# Altium PCB H202.PcbDoc (part 1 of 4)
Units mm, origin at the board's own origin, x right, y up, seen from the top; angles counter-clockwise.
Board outline 35.5 x 51.5 mm, 2 copper layers (Top Layer, Bottom Layer); 187 components, 179 nets, 669 pads, 25 vias.
Unrouted connection lines stored in the file: 414.
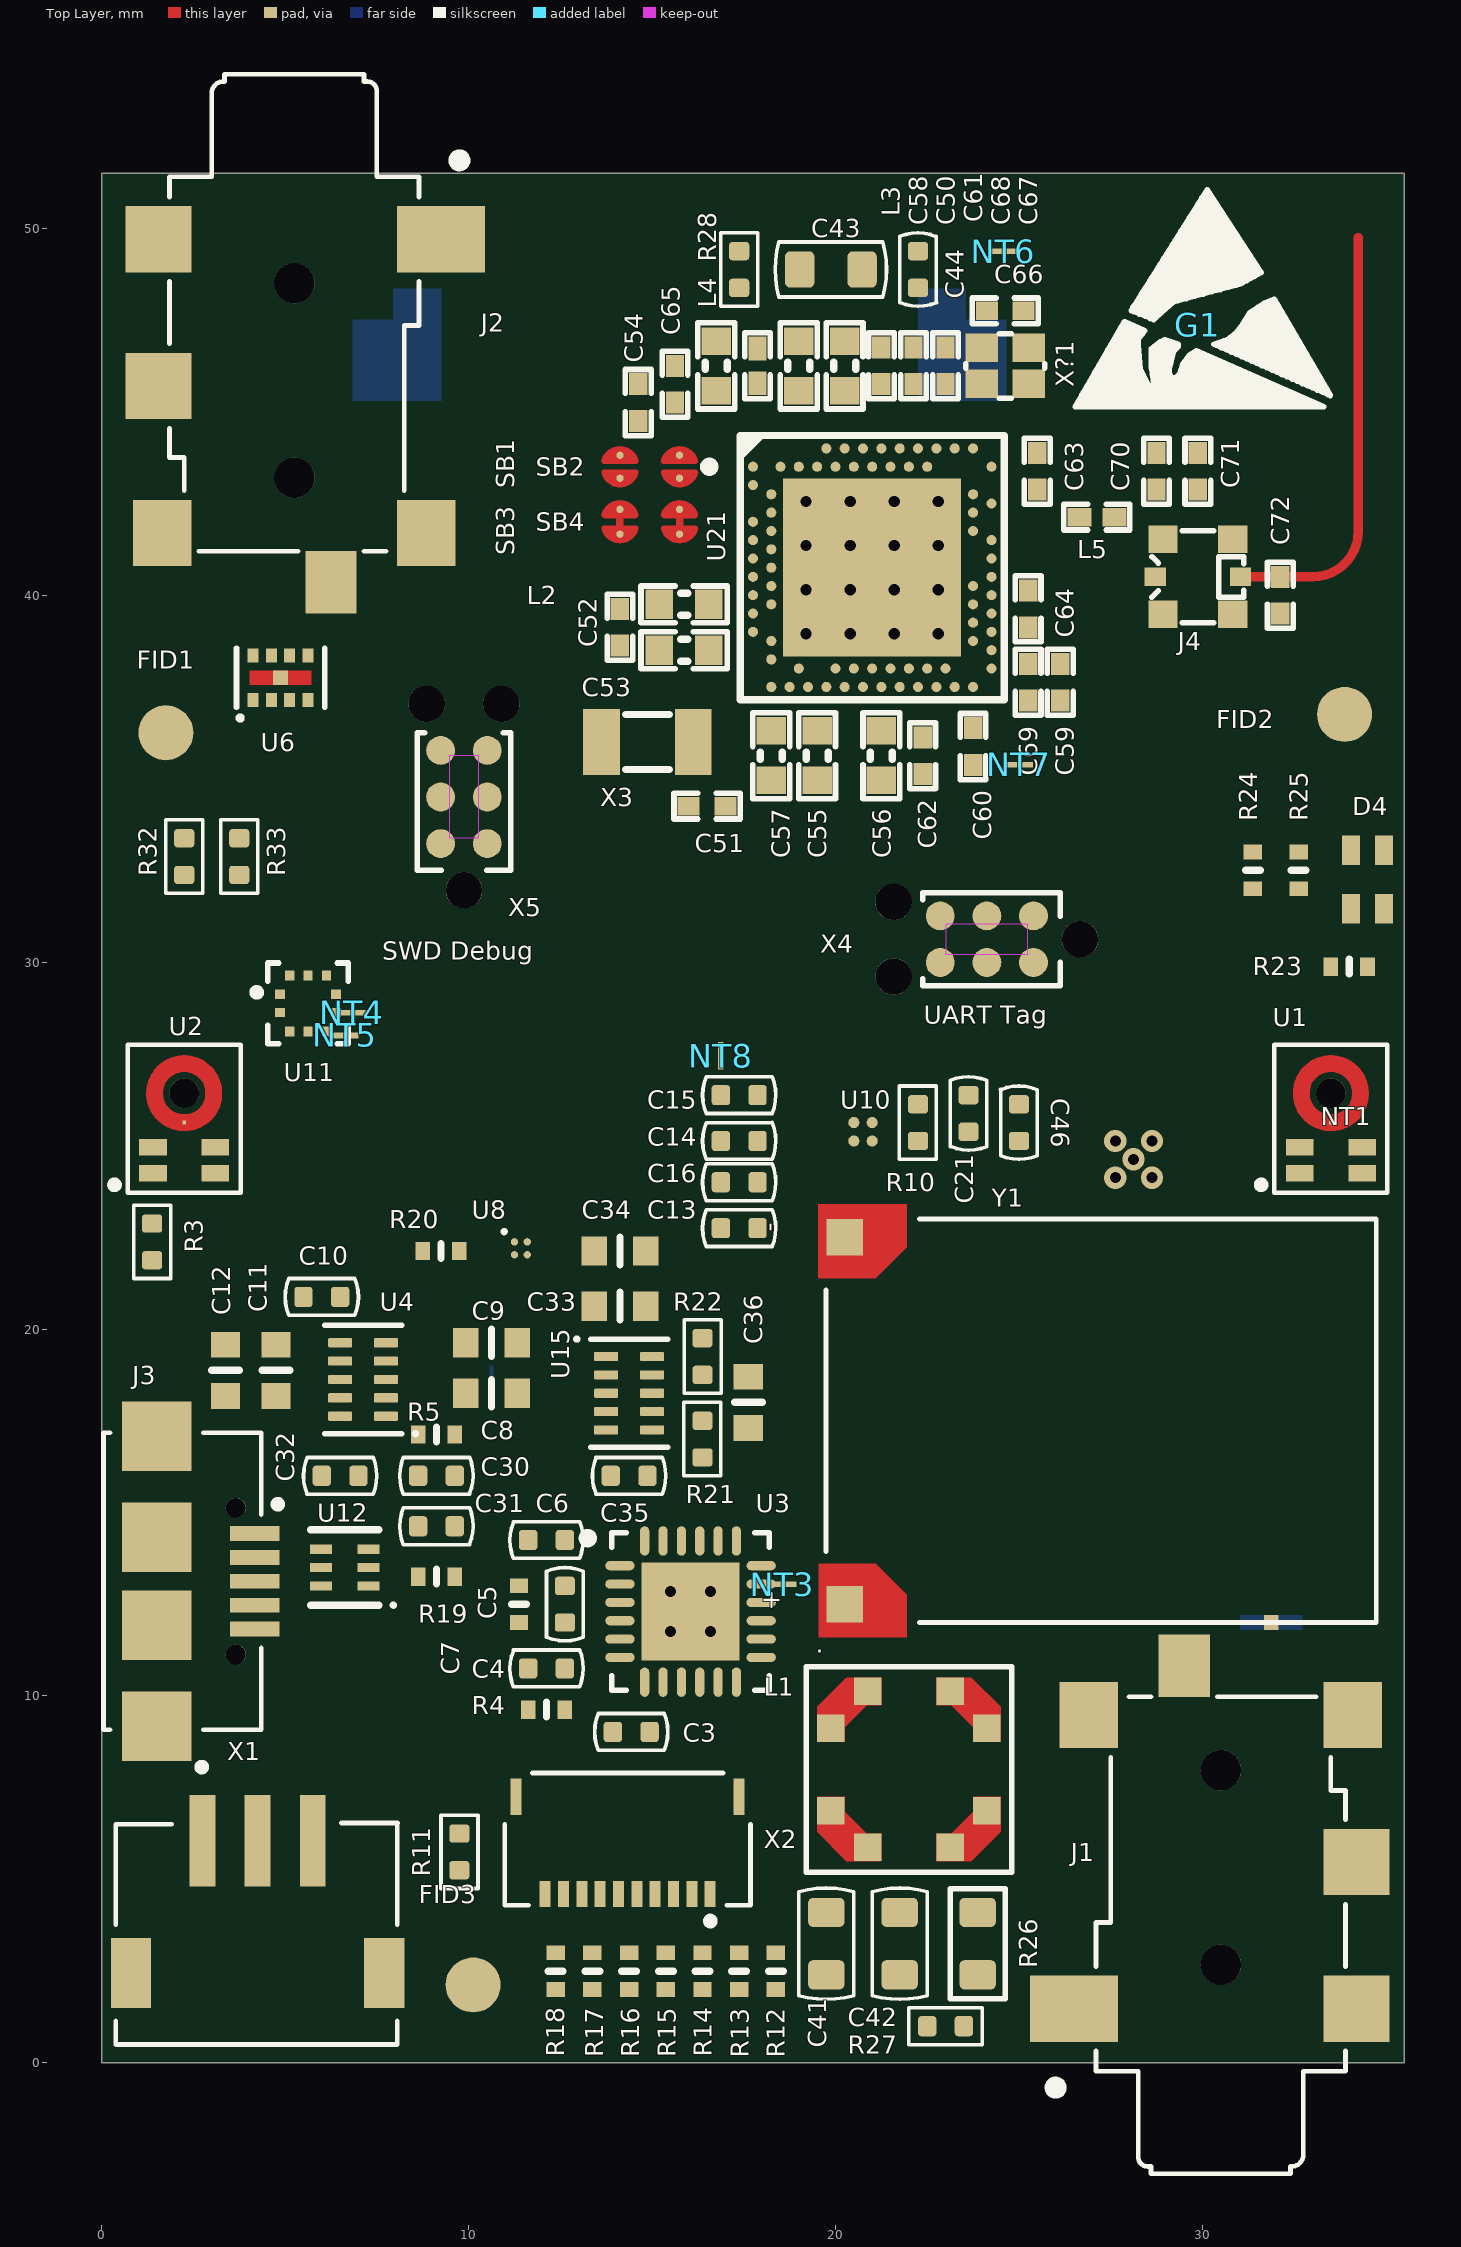
[diagram p0: Top Layer view]
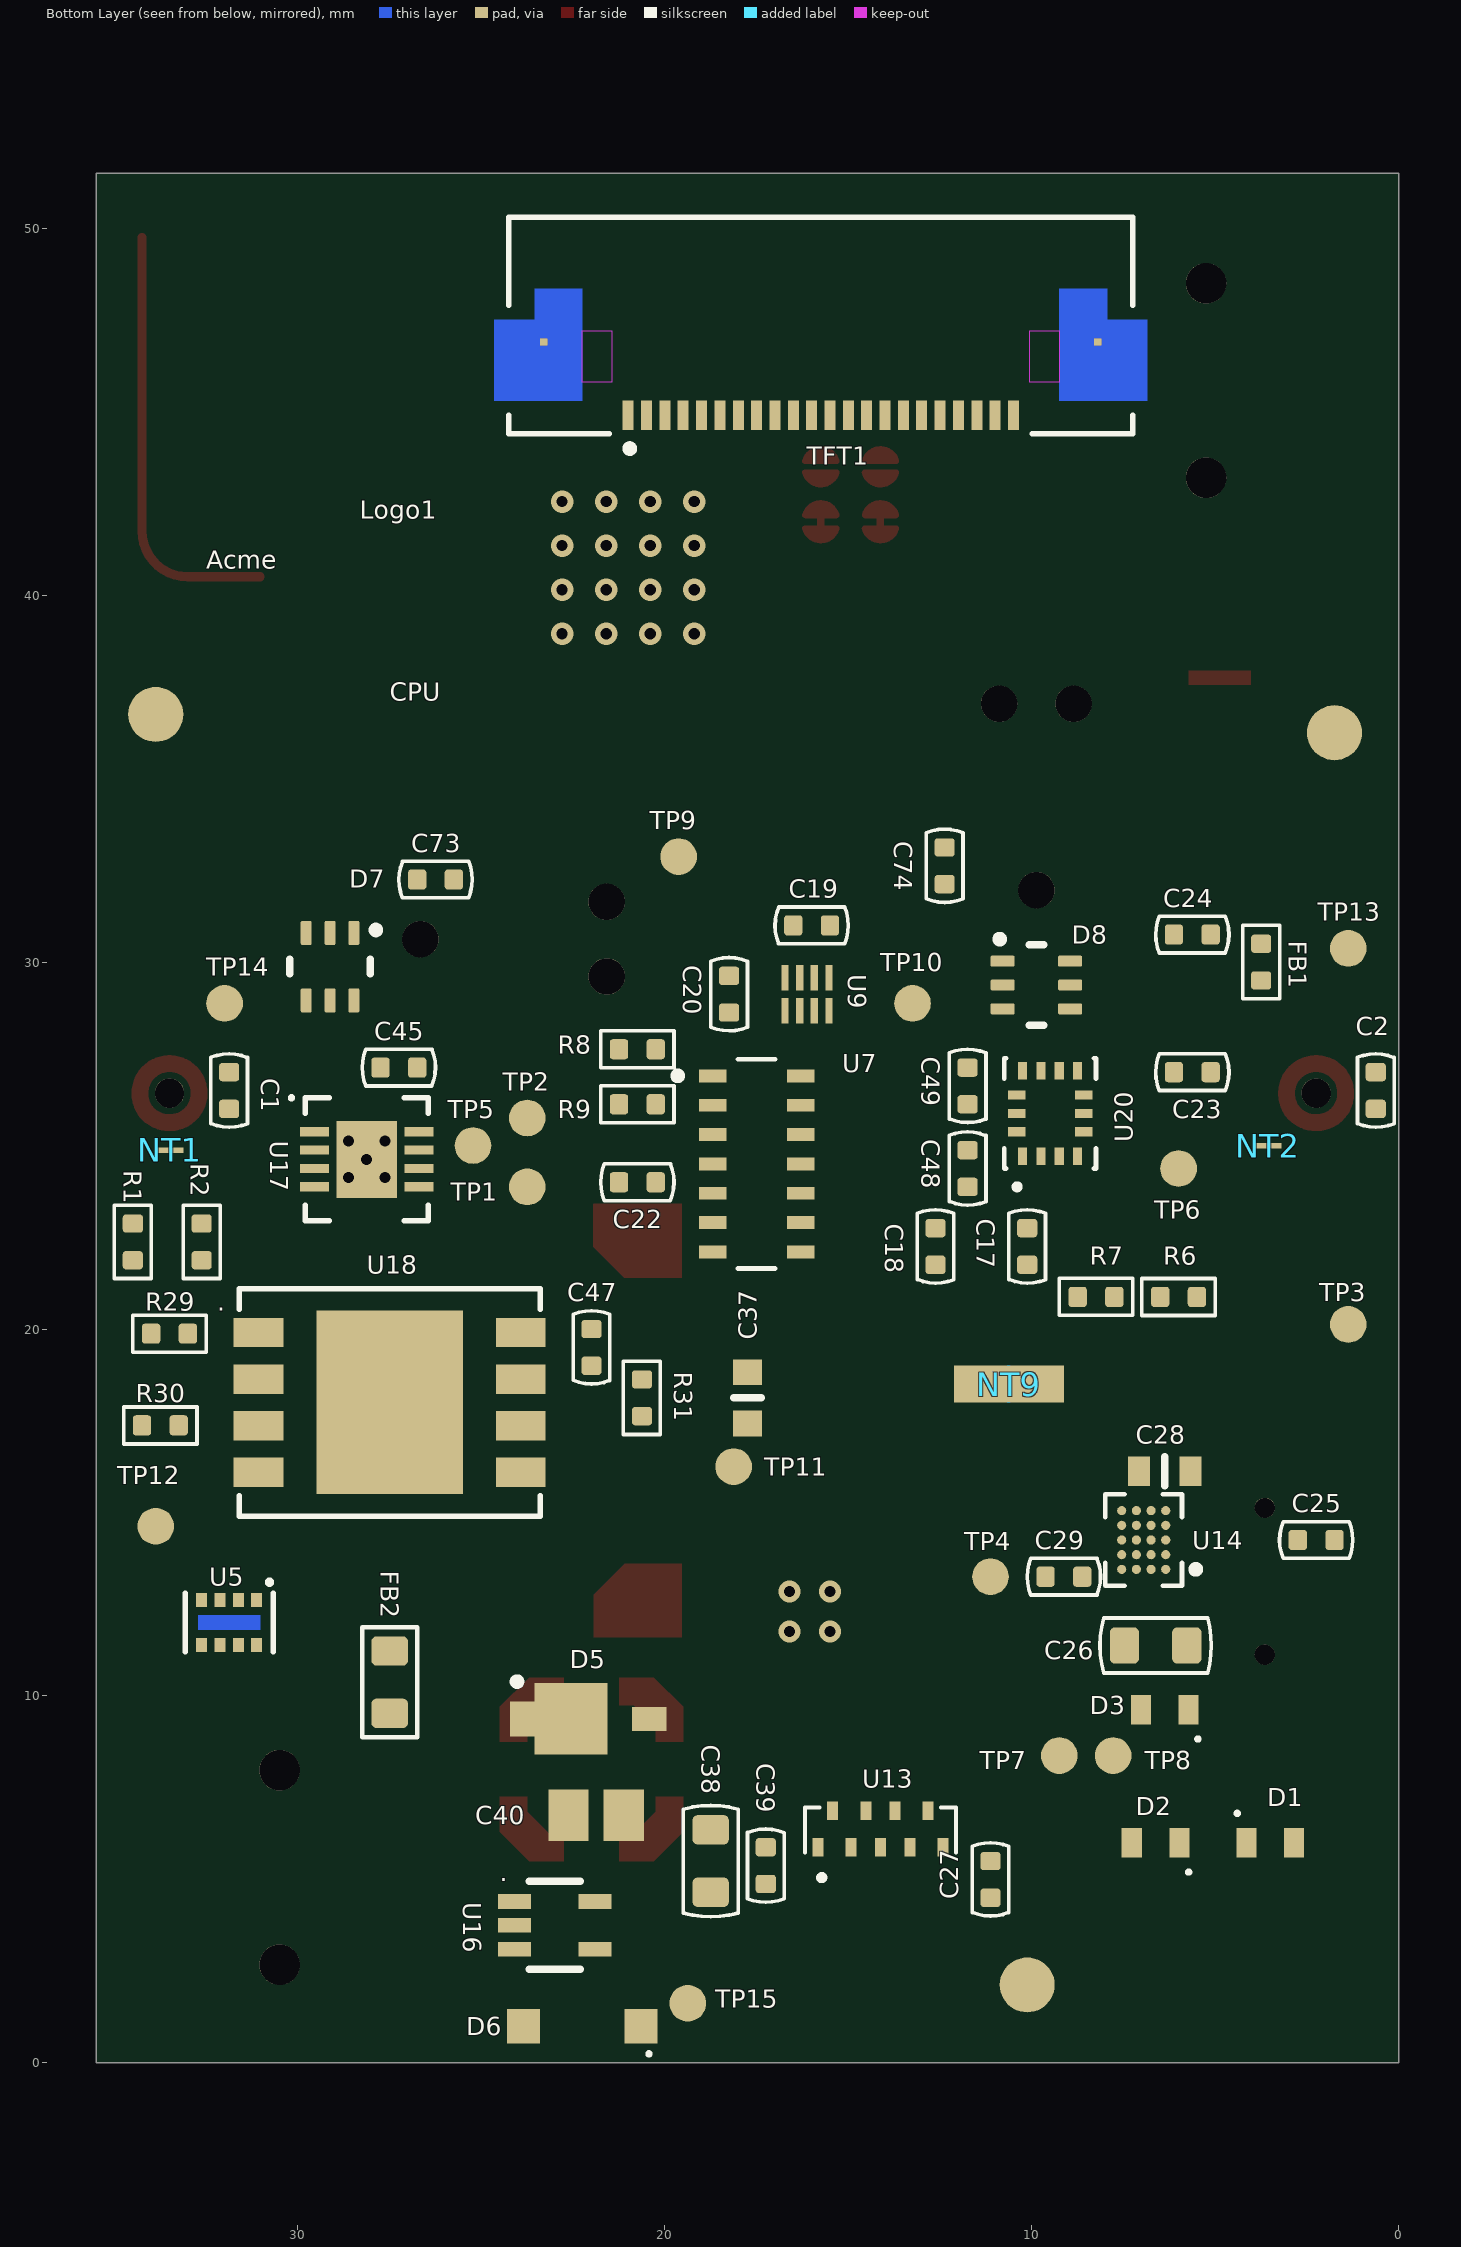
[diagram p1: Bottom Layer view, seen from below]

## Layer stack, top to bottom
Top Solder: solder mask 0.0102, Solder Resist, Dk 3.5
Top Layer: signal copper 0.0356
Dielectric 1: dielectric 0.32, FR-4, Dk 4.8
Bottom Layer: signal copper 0.0356
Bottom Solder: solder mask 0.0102, Solder Resist, Dk 3.5

## Board outline
0,0 35.5,0 35.5,51.5 0,51.5

## Design rules (kind name [scope] priority, off if disabled: settings)
Clearance [All] p1: gap=0.254 ignorepadtopadclearanceinfootprint=FALSE except(0: Arc-Hole Track-Hole SMDPad-Hole THPad-Hole Via-Hole Fill-Hole Poly-Hole Region-Hole Text-Hole)
DiffPairsRouting [All] p1: maxlimit=0.254 minlimit=0.254 mostfreqgap=0.254 toplayer_minwidth=0.381 toplayer_maxwidth=0.381 toplayer_prefwidth=0.381 bottomlayer_minwidth=0.381 bottomlayer_maxwidth=0.381 bottomlayer_prefwidth=0.381 maxuncoupledlength=12.7
PolygonConnect [All] p1: connectstyle=Relief reliefconductorwidth=0.254 reliefentries=4 polygonreliefangle="90 Angle" airgapwidth=0.254
RoutingVias [All] p1: holewidth=0.711 width=1.27 viastyle="Through Hole" minholewidth=0.711 minwidth=1.27 maxholewidth=0.711 maxwidth=1.27
SolderMaskExpansion [All] p1: expansion=0.102 istentingtop=FALSE
Width [All] p1: maxlimit=0.254 minlimit=0.254 preferedwidth=0.254
29 further rules are at their usual default settings.

## Classes and differential pairs
channel class TC2030-NL_TagConnect_6-pin: P01 P02 P012 P022
component class P02: C74 D8 X5
component class P01: C73 D7 X4
channel class TPSM82822_2A_Buck_Module: +3V3_PS1 +3V3_PS2
channel class IM69D130_MEMS_Microphone: MIC1 MIC2
net class USB: USB.D_N USB.D_P USB_CONN_N USB_CONN_P
net class QSPI: QSPI.CLK QSPI.IO0/DO QSPI.IO1/DI QSPI.IO2/WP QSPI.IO3/HD QSPI.NCS
component class VLT: C19 C20 U9
component class USB: C25 C26 D3 J3 U12
component class U_nrf52840_mcu: C50 C51 C52 C53 C54 C55 C56 C57 C58 C59 C60 C61 C62 C63 C64 C65 C66 C67 C68 C69 C70 C71 C72 J4 L2 L3 L4 L5 SB1 SB2 SB3 SB4 U21 X3 X?1
component class U_ESP32-WROOM32D_Module: R8 R9
component class U_BMI270-Accelerometer-Gyroscope: C48 C49 U20
component class TFT: C43 C44 R28 TFT1
component class TestPoint: TP1 TP2 TP3 TP4 TP5 TP6 TP7 TP8 TP9 TP10 TP11 TP12 TP13 TP14 TP15
component class PCB_FEATURE: Logo1
component class "Net Tie": NT1 NT2 NT3 NT4 NT5 NT6 NT7 NT8 NT9
component class MIC2: C2 R3 U2
component class MIC1: C1 R2 U1
component class LSW: C21 C22 R10 U10
component class LED_DRV: C45 C46 U17
component class K_PAD: C27 R11 R12 R13 R14 R15 R16 R17 R18 U13 X2
component class HRS1: C13 C14 C15 C16 U7
component class HRMI: NT8 R8 R9
component class HRME: R32 R33
component class FLASH: C47 R29 R30 R31 U18
component class FiducialMark: FID1 FID2 FID3
component class CODEC: C3 C4 C5 C6 C7 R4 U3
component class BMP388: C23 C24 FB1 U11
component class BL_PS: C38 C39 C40 C41 C42 D5 D6 FB2 L1 R26 R27 U16
component class BC: C28 C29 C30 C31 C32 R19 U14
component class +3V3_PS2: C33 C34 C35 C36 C37 R20 R21 R22 U15
component class +3V3_PS1: C8 C9 C10 C11 C12 R5 R6 R7 U4
component class +1V8_PS1: C17 C18 U8
differential pair USB_CONN: +USB_CONN_P -USB_CONN_N
differential pair USB.D: +USB.D_P -USB.D_N
differential pair D: +D_P -D_N

## Components (designator, comment, footprint, x,y, rotation, side; value= is the part's Value field where it differs from the comment)
C1 "CAP CER 0.1UF 50V X7R 0402" C0402 31.875,26.5 r270 bottom (schematic designator C2)
C2 "CAP CER 0.1UF 50V X7R 0402" C0402 0.625,26.5 r270 bottom
C3 "CAP CER 10nF 25V X7R 10% 0402" C0402 14.433,9.02 r0 top
C4 "CAP CER 10PF 50V C0G/NP0 0402" C0402 12.125,10.75 r0 top
C5 "C 100pF 50V C0G, NP0 0402" CAP_0402 11.375,12.5 r270 top
C6 "CAP CER 10nF 25V X7R 10% 0402" C0402 12.125,14.25 r0 top
C7 "CAP CER 0.1UF 50V X7R 0402" C0402 12.625,12.5 r270 top
C8 "CAP CER 10UF 16V X5R 0603" CAPC1608X08N_0603 10.625,18.25 r0 top (schematic designator C1)
C9 "CAP CER 10UF 16V X5R 0603" CAPC1608X08N_0603 10.625,19.625 r0 top (schematic designator C2)
C10 "CAP CER 100PF 50V C0G/NPO 0402" C0402 6,20.875 r180 top (schematic designator C3)
C11 "CAP CER 10UF 16V X5R 0603" CAPC1608X08N_0603 4.75,18.875 r270 top (schematic designator C4)
C12 "CAP CER 10UF 16V X5R 0603" CAPC1608X08N_0603 3.375,18.875 r270 top (schematic designator C5)
C13 "CAP CER 0.1UF 50V X7R 0402" C0402 17.375,22.75 r180 top (schematic designator C8)
C14 "CAP CER 4.7UF 6.3V X5R 0402" C0402 17.375,25.125 r0 top (schematic designator C9)
C15 "CAP CER 0.1UF 50V X7R 0402" C0402 17.375,26.375 r0 top (schematic designator C10)
C16 "CAP CER 10UF 6.3V X5R 0402" C0402 17.375,24 r180 top (schematic designator C11)
C17 "CAP CER 2.2UF 6.3V X5R 0402" C0402 10.124,22.25 r90 bottom (schematic designator C1)
C18 "CAP CER 2.2UF 6.3V X5R 0402" C0402 12.625,22.25 r90 bottom (schematic designator C2)
C19 "CGA2B3X7R1H104K050BB" C0402 16,31 r0 bottom (schematic designator C1)
C20 "CGA2B3X7R1H104K050BB" C0402 18.25,29.125 r270 bottom (schematic designator C2)
C21 "CAP CER 1UF 16V X5R 0402" C0402 23.625,25.875 r270 top (schematic designator C1)
C22 "CAP CER 0.1UF 50V X7R 0402" C0402 20.75,24 r0 bottom (schematic designator C2)
C23 "CAP CER 0.1UF 16V X7R 0402" C0402 5.625,27 r0 bottom (schematic designator C1)
C24 "CAP CER 0.1UF 16V X7R 0402" C0402 5.625,30.75 r0 bottom (schematic designator C2)
C25 "Value" C0402 2.25,14.25 r0 bottom (schematic designator C12)
C26 "Value" 0603C 6.625,11.375 r180 bottom (schematic designator C13)
C27 "CAP CER 0.1UF 50V X7R 0402" C0402 11.125,5 r270 bottom (schematic designator C14)
C28 "CAP CER 1UF 25V X5R 0603" CAP_0603 6.375,16.125 r180 bottom (schematic designator C15)
C29 "CAP CER 10UF 6.3V X5R 0402" C0402 9.125,13.25 r0 bottom (schematic designator C16)
C30 "CAP CER 4.7UF 6.3V X5R 0402" C0402 9.125,16 r0 top (schematic designator C17)
C31 "CAP CER 10UF 6.3V X5R 0402" C0402 9.125,14.625 r0 top (schematic designator C18)
C32 "CAP CER 2.2UF 6.3V X5R 0402" C0402 6.5,16 r180 top (schematic designator C19)
C33 "CAP CER 10UF 16V X5R 0603" CAPC1608X08N_0603 14.125,20.625 r0 top (schematic designator C1)
C34 "CAP CER 10UF 16V X5R 0603" CAPC1608X08N_0603 14.125,22.125 r0 top (schematic designator C2)
C35 "CAP CER 100PF 50V C0G/NPO 0402" C0402 14.375,16 r180 top (schematic designator C3)
C36 "CAP CER 10UF 16V X5R 0603" CAPC1608X08N_0603 17.625,18 r90 top (schematic designator C4)
C37 "CAP CER 10UF 16V X5R 0603" CAPC1608X08N_0603 17.75,18.125 r90 bottom (schematic designator C5)
C38 "CAP CER 10UF 16V X5R 0603" C0603 18.75,5.5 r270 bottom (schematic designator C1)
C39 "CAP CER 0.1UF 50V X7R 0402" C0402 17.25,5.375 r90 bottom (schematic designator C2)
C40 "CAP CER 10UF 16V X7R 0805" C0805 21.875,6.75 r180 bottom (schematic designator C3)
C41 "CAP CER 10UF 16V X5R 0603" C0603 19.75,3.25 r270 top (schematic designator C4)
C42 "CAP CER 10UF 16V X5R 0603" C0603 21.75,3.25 r90 top (schematic designator C5)
C43 "CAP CER 10UF 16V X5R 0603" C0603 19.875,48.875 r180 top (schematic designator C1)
C44 "CAP CER 0.1UF 16V X7R 0402" C0402 22.25,48.875 r270 top (schematic designator C2)
C45 "CAP CER 1UF 16V X5R 0402" C0402 27.25,27.125 r180 bottom (schematic designator C1)
C46 "CAP CER 0.1UF 50V X7R 0402" C0402 25,25.625 r90 top (schematic designator C2)
C47 "CAP CER 0.1UF 50V X7R 0402" C0402 22,19.5 r270 bottom (schematic designator C1)
C48 "CAP CER 0.1UF 16V X7R 0402" C0402 11.75,24.375 r90 bottom (schematic designator C1)
C49 "CAP CER 0.1UF 16V X7R 0402" C0402 11.75,26.625 r270 bottom (schematic designator C2)
C50 "4.7µF" CAPC1608X06L 20.25,46.25 r90 top (schematic designator C6)
C51 "12pF" CAPC1005X04L 16.5,34.25 r180 top (schematic designator C17)
C52 "12pF" CAPC1005X04L 14.125,39.125 r90 top (schematic designator C18)
C53 "4.7µF" CAPC1608X06L 15.875,38.5 r180 top (schematic designator C19)
C54 "100nF" CAPC1005X04L 14.625,45.25 r90 top (schematic designator C5)
C55 "4.7µF" CAPC1608X06L 19.5,35.625 r270 top (schematic designator C20)
C56 "1.0µF" CAPC1608X06L 21.25,35.625 r270 top (schematic designator C14)
C57 "4.7µF" CAPC1608X06L 18.25,35.625 r270 top (schematic designator C21)
C58 "1.0µF" CAPC1608X06L 19,46.25 r270 top (schematic designator C15)
C59 "47nF" CAPC1005X04L 26.125,37.625 r270 top (schematic designator C16)
C60 "100nF" CAPC1005X04L 23.75,35.875 r270 top (schematic designator C7)
C61 "N.C." CAPC1005X04L 21.25,46.25 r90 top (schematic designator C13)
C62 "100nF" CAPC1005X04L 22.375,35.625 r270 top (schematic designator C12)
C63 "0.8pF" CAPC1005X04L 25.5,43.375 r270 top (schematic designator C3)
C64 "820pF" CAPC1005X04L 25.25,39.625 r270 top (schematic designator C9)
C65 "100nF" CAPC1005X04L 15.625,45.75 r90 top (schematic designator C8)
C66 "12pF" CAPC1005X04L 24.625,47.75 r180 top (schematic designator C2)
C67 "12pF" CAPC1005X04L 23,46.25 r90 top (schematic designator C1)
C68 "100pF" CAPC1005X04L 22.125,46.25 r90 top (schematic designator C11)
C69 "N.C." CAPC1005X04L 25.25,37.625 r90 top (schematic designator C10)
C70 "0.5pF" CAPC1005X04L 28.75,43.375 r270 top (schematic designator C4)
C71 "N.C." CAPC1005X04L 29.875,43.375 r90 top (schematic designator C22)
C72 "1.2pF" CAPC1005X04L 32.125,40 r270 top (schematic designator C23)
C73 "CAP CER 0.1UF 50V X7R 0402" C0402 26.25,32.25 r180 bottom (schematic designator C1)
C74 "CAP CER 0.1UF 50V X7R 0402" C0402 12.375,32.625 r90 bottom (schematic designator C1)
D1 "ESDA7P120-1U1M" ST_QFN_1610 3.5,6 r180 bottom
D2 "ESDA7P120-1U1M" ST_QFN_1610 6.625,6 r0 bottom
D3 "ESDA7P120-1U1M" ST_QFN_1610 6.375,9.625 r0 bottom
D4 "150066M153000" LED_0606_RGB_WURTH 34.5,32.25 r90 top
D5 "STPS120MF" SODFL375X95-2N 22.125,9.375 r180 bottom (schematic designator D1)
D6 "MMSZ5226B-7-F" SOD-123 22.25,1 r0 bottom (schematic designator D2)
D7 "SMF05CT1G" SOT363_SOP65P210X265-6N 29.125,29.875 r270 bottom (schematic designator D1)
D8 "SMF05CT1G" SOT363_SOP65P210X265-6N 9.875,29.375 r180 bottom (schematic designator D1)
FB1 "FERRITE BEAD 1 KOHM 0402 1LN" L0402 3.75,30 r90 bottom
FB2 "FERRITE BEAD 470 OHM 0603 1LN" L0603 27.5,10.375 r270 bottom (schematic designator FB1)
FID1 "N/A" Fiducial 1.75,36.25 r0 top
FID2 "N/A" Fiducial 33.875,36.75 r90 top
FID3 "N/A" Fiducial 10.125,2.125 r90 top
G1 "Logo_ESD" Logo_ESD 29.875,47.375 r0 top
J1 "SJ2-25515B-SMT-TR" CUI_SJ2-25515B-SMT-TR 30.5,4.875 r90 top
J2 "SJ2-25515B-SMT-TR" CUI_SJ2-25515B-SMT-TR 5.25,46.3 r270 top
J3 "UJ2-MIBH-G-SMT-TR" CUI_UJ2-MIBH-G-SMT-TR 1.5,13.125 r270 top
J4 "MM8130-2600" COAXIAL-SWF 29.875,40.5 r90 top (schematic designator J1)
L1 "FIXED IND COUIPLED 6.8UH 1.2A 160 mOHM SMD" IND_LPD5030 22,8 r0 top
L2 "10µH" INDC1608X06L 15.875,39.75 r180 top (schematic designator L4)
L3 "15nH" INDC1005X04L 17.875,46.25 r90 top
L4 "10µH" INDC1608X06L 16.75,46.25 r270 top (schematic designator L2)
L5 "4.7nH" INDC1005X04L 27.125,42.125 r0 top (schematic designator L1)
Logo1 "Logo ACME_CPU" LOGO_ACME_CPU 27.5,40.625 r180 bottom (schematic designator Logo)
NT1 "Net Tie" "Net Tie 6x30mil"#1 33.5,24.875 r0 top net-tie
NT2 "Net Tie" "Net Tie 6x30mil"#2 3.572,25 r180 bottom net-tie
NT3 "Net Tie" "Net Tie 6x30mil"#2 18.551,13.04 r180 top net-tie
NT4 "Net Tie" "Net Tie 6x30mil"#2 6.822,28.625 r180 top net-tie
NT5 "Net Tie" "Net Tie 6x30mil"#2 6.625,28 r0 top net-tie
NT6 "Net Tie" "Net Tie 6x30mil"#2 24.572,49.375 r180 top net-tie
NT7 "Net Tie" "Net Tie 6x30mil"#2 25,35.375 r180 top net-tie
NT8 "Net Tie" "Net Tie 6x30mil"#2 16.875,27.447 r270 top net-tie
NT9 "Net Tie" "Net Tie 1x3mm" 10.625,18.5 r180 bottom net-tie
R1 "RES SMD 100 OHM 1% 1/16W 0402" 0402R 34.5,22.375 r270 bottom
R2 "RES SMD 100 OHM 1% 1/16W 0402" 0402R 32.625,22.375 r90 bottom
R3 "RES SMD 100 OHM 1% 1/16W 0402" 0402R 1.375,22.375 r90 top (schematic designator R2)
R4 "RES SMD 63.4K OHM 1% 1/16W 0402" R_0402 12.125,9.625 r180 top (schematic designator R3)
R5 "RES SMD 910K OHM 1% 1/16W 0402" R_0402 9.125,17.125 r0 top (schematic designator R1)
R6 "RES SMD 390K OHM 1% 1/16W 0402" R0402 6,20.875 r180 bottom (schematic designator R2)
R7 "RES SMD 88.7K OHM 1% 1/16W 0402" 0402R 8.25,20.875 r0 bottom (schematic designator R3)
R8 "RES SMD 2.7K OHM 1% 1/16W 0402" R0402 20.75,27.625 r0 bottom (schematic designator R4)
R9 "RES SMD 2.7K OHM 1% 1/16W 0402" R0402 20.75,26.125 r0 bottom (schematic designator R5)
R10 "RES SMD 10K OHM 1% 1/16W 0402" R0402 22.25,25.625 r270 top (schematic designator R1)
R11 "RES SMD 10K OHM 1% 1/16W 0402" 0402R 9.75,5.75 r90 top (schematic designator R8)
R12 "RES SMD 18.2K OHM 1% 1/16W 0402" R_0402 18.375,2.5 r90 top (schematic designator R9)
R13 "RES SMD 11K OHM 1% 1/16W 0402" R_0402 17.375,2.5 r90 top (schematic designator R10)
R14 "RES SMD 7.5K OHM 1% 1/10W 0603" R_0402 16.375,2.5 r90 top (schematic designator R11)
R15 "RES SMD 5.36K OHM 1% 1/16W 0402" R_0402 15.375,2.5 r90 top (schematic designator R12)
R16 "RC0402FR-072K7L" R_0402 14.375,2.5 r90 top (schematic designator R13)
R17 "RES SMD 2.7K OHM 1% 1/16W 0402" R_0402 13.375,2.5 r90 top (schematic designator R14)
R18 "RES SMD 1K OHM 1% 1/16W 0402" R_0402 12.375,2.5 r90 top (schematic designator R15)
R19 "RES SMD 5.1K OHM 1% 1/16W 0402" R_0402 9.125,13.25 r180 top (schematic designator R16)
R20 "RES SMD 910K OHM 1% 1/16W 0402" R_0402 9.25,22.125 r180 top (schematic designator R1)
R21 "RES SMD 390K OHM 1% 1/16W 0402" R0402 16.375,17 r270 top (schematic designator R2)
R22 "RES SMD 88.7K OHM 1% 1/16W 0402" 0402R 16.375,19.25 r90 top (schematic designator R3)
R23 "RES SMD 402 OHM 1% 1/16W 0402" R_0402 34,29.875 r0 top value=22k (schematic designator R17)
R24 "RES SMD 402 OHM 1% 1/16W 0402" R_0402 31.375,32.5 r90 top value=22k (schematic designator R18)
R25 "RES SMD 402 OHM 1% 1/16W 0402" R_0402 32.625,32.5 r90 top value=22k (schematic designator R19)
R26 "RES SMD 2.26 OHM 1% 1/10W 0603" R0603 23.875,3.25 r270 top (schematic designator R1)
R27 "RES SMD 63.4K OHM 1% 1/16W 0402" R0402 23,1 r0 top (schematic designator R2)
R28 "RES SMD 1K OHM 1% 1/16W 0402" R0402 17.375,48.875 r90 top (schematic designator R1)
R29 "RES SMD 10K OHM 1% 1/16W 0402" R0402 33.5,19.875 r180 bottom (schematic designator R1)
R30 "RES SMD 10K OHM 1% 1/16W 0402" R0402 33.75,17.375 r180 bottom (schematic designator R2)
R31 "RES SMD 10K OHM 1% 1/16W 0402" R0402 20.625,18.125 r270 bottom (schematic designator R3)
R32 "DNP*" 0402R 2.25,32.875 r90 top (schematic designator R6)
R33 "DNP*" 0402R 3.75,32.875 r90 top (schematic designator R7)
SB1 "Solderbridge" Solderbridge 15.75,43.5 r90 top (schematic designator SB4)
SB2 "Solderbridge" Solderbridge 14.125,43.5 r90 top (schematic designator SB3)
SB3 "Solderbridge" Solderbridge_Shorted 15.75,42 r90 top net-tie (schematic designator SB2)
SB4 "Solderbridge" Solderbridge_Shorted 14.125,42 r90 top net-tie (schematic designator SB1)
TFT1 "LH200K-IF05" CONN_0524352271_j 15.75,48 r270 bottom
TP1 "Test Point Pad" Testpoint 23.75,23.875 r180 bottom
TP2 "Test Point Pad" Testpoint 23.75,25.75 r90 bottom
TP3 "Test Point Pad" Testpoint 1.375,20.125 r90 bottom
TP4 "Test Point Pad" Testpoint 11.125,13.25 r90 bottom
TP5 "Test Point Pad" Testpoint 25.229,25 r90 bottom
TP6 "Test Point Pad" Testpoint 6,24.375 r90 bottom
TP7 "Test Point Pad" Testpoint 9.25,8.375 r90 bottom
TP8 "Test Point Pad" Testpoint 7.784,8.375 r90 bottom
TP9 "Test Point Pad" Testpoint 19.625,32.875 r90 bottom
TP10 "Test Point Pad" Testpoint 13.25,28.875 r90 bottom
TP11 "Test Point Pad" Testpoint 18.125,16.25 r90 bottom
TP12 "Test Point Pad" Testpoint 33.875,14.625 r90 bottom
TP13 "Test Point Pad" Testpoint 1.375,30.375 r90 bottom
TP14 "Test Point Pad" Testpoint 32,28.875 r90 bottom
TP15 "Test Point Pad" Testpoint 19.375,1.625 r90 bottom
U1 "IM69D130V01XTSA1" MIC_IM69D130V01XTSA1 33.5,25.75 r180 top (schematic designator U2)
U2 "IM69D130V01XTSA1" MIC_IM69D130V01XTSA1 2.25,25.75 r180 top
U3 "CMX655DQ6" QFN50P400X400X100_HS-25N 16.05,12.3 r0 top
U4 "TPSM82822SILR" SIL0010D 7.125,18.625 r180 top (schematic designator U1)
U5 "TPD3F303DPVR" DPV8_1P7X0P4#1 31.875,12 r270 bottom (schematic designator U4)
U6 "TPD3F303DPVR" DPV8_1P7X0P4#2 4.875,37.75 r90 top (schematic designator U5)
U7 "MAX30102EFD+T" XDCR_MAX30101EFD+ 17.5,24.5 r180 bottom (schematic designator U6)
U8 "LDLN025J18R" Flip-Chip4 11.425,22.2 r0 top (schematic designator U1)
U9 "TXS0102DQMR" DQM8 16.125,29.125 r270 bottom (schematic designator U1)
U10 "TPS22930AYZVT" YZV4_TEX 20.75,25.375 r90 top (schematic designator U1)
U11 "BMP388" QFN_BMP388_BOS 5.625,28.875 r0 top (schematic designator U1)
U12 "ECMF02-2AMX6" QFN-6L 6.625,13.5 r180 top (schematic designator U7)
U13 "D3V3F8U9LP3810-7" U-DFN3810-9 14.125,6.375 r90 bottom (schematic designator U8)
U14 "BQ25157YFPR" YFP0020 6.95,14.25 r0 bottom (schematic designator U9)
U15 "TPSM82822SILR" SIL0010D 14.375,18.25 r0 top (schematic designator U1)
U16 "TPS61169DCKR" DCK0005A_L 23,3.75 r180 bottom (schematic designator U1)
U17 "PCA9632TK,118" SOT908-1 28.125,24.625 r180 bottom (schematic designator U1)
U18 "MT29F1G01ABAFDWB-IT:F TR" W-PDFN-8_8X6_P127 27.5,18 r180 bottom (schematic designator U1)
U20 "BMI270" XDCR_BMI270 9.5,25.875 r90 bottom (schematic designator U1)
U21 "nRF52840-QIAA" AQFN50P700X700X85_HS-74N 21,40.75 r0 top (schematic designator U1)
X1 "BATT" JST_S3B-ZR-SM4A-TF 4.25,4.25 r0 top
X2 "CONN 5034801000 FFC FPC 10POS 0.50MM R/A" MOLEX_5034801000 14.335,6.1 r180 top
X3 "32.768kHz" XTAL_3215 14.875,36 r180 top (schematic designator X2)
X4 "SWD" TC2030-IDC-NL 24.125,30.625 r180 top (schematic designator X1)
X5 "DEBUG" TC2030-IDC-NL 9.875,34.5 r90 top (schematic designator X1)
X?1 "32MHz" 4-SMD 24.625,46.25 r0 top (schematic designator X?)
Y1 "CMS-151135-078S" SPKR_CMS-151135-078S 27.24,17.5 r270 top

## Footprints (in the part's own frame and the unit in brackets; to place one, negate y for a bottom-side part, rotate by r counter-clockwise, add the part's x,y. Pads: shape width x height; smd on the part's side, far side on the other; paste and mask are expansions set on the pad)
4-SMD [mm]
  rect 0.88x0.78 smd mask+0.075: 1(-0.64,-0.49) 2(0.64,-0.49) 3(0.64,0.49) 4(-0.64,0.49)
  silkscreen extent -1.08,-0.88 1.08,0.88, body extent -1.05,-0.85 1.05,0.85, height 0.56
0402R [mm]
  rrect35% 0.5x0.55 smd: 1(-0.5,0) 2(0.5,0)
  silkscreen extent -1,-0.51 1,0.5, body extent -0.53,-0.25 0.53,0.25, height 0.71
0603C [mm]
  rrect35% 0.8x0.991 smd: 1(-0.85,0) 2(0.85,0)
  silkscreen extent -1.52,-0.75 1.52,0.75, body extent -0.88,-0.48 0.87,0.47, height 0.87
AQFN50P700X700X85_HS-74N [mm]
  rect 4.85x4.85 smd mask+0.05: 74(0,0)
  round 0.275 smd paste+0.012 mask+0.05: A8(-1.25,3.25) A10(-0.75,3.25) A12(-0.25,3.25) A14(0.25,3.25) A16(0.75,3.25) A18(1.25,3.25) A20(1.75,3.25) A22(2.25,3.25) A23(2.75,3.25) AA24(3.25,-2.25) AB2(-2.75,-2.5) AC5(-2,-2.75) AC9(-1,-2.75) AC11(-0.5,-2.75) AC13(0,-2.75) AC15(0.5,-2.75) AC17(1,-2.75) AC19(1.5,-2.75) AC21(2,-2.75) AC24(3.25,-2.75) AD2(-2.75,-3.25) AD4(-2.25,-3.25) AD6(-1.75,-3.25) AD8(-1.25,-3.25) AD10(-0.75,-3.25) AD12(-0.25,-3.25) AD14(0.25,-3.25) AD16(0.75,-3.25) AD18(1.25,-3.25) AD20(1.75,-3.25) AD22(2.25,-3.25) AD23(2.75,-3.25) B1(-3.25,2.75) B3(-2.5,2.75) B5(-2,2.75) B7(-1.5,2.75) B9(-1,2.75) B11(-0.5,2.75) B13(0,2.75) B15(0.5,2.75) B17(1,2.75) B19(1.5,2.75) B24(3.25,2.75) C1(-3.25,2.25) D2(-2.75,2) D23(2.75,2) E24(3.25,1.75) F2(-2.75,1.5) F23(2.75,1.5) G1(-3.25,1.25) H2(-2.75,1) H23(2.75,1) J1(-3.25,0.75) J24(3.25,0.75) K2(-2.75,0.5) L1(-3.25,0.25) L24(3.25,0.25) M2(-2.75,0) N1(-3.25,-0.25) N24(3.25,-0.25) P2(-2.75,-0.5) P23(2.75,-0.5) R1(-3.25,-0.75) R24(3.25,-0.75) T2(-2.75,-1) T23(2.75,-1) U1(-3.25,-1.25) U24(3.25,-1.25) V23(2.75,-1.5) W1(-3.25,-1.75) W24(3.25,-1.75) Y2(-2.75,-2) Y23(2.75,-2)
  silkscreen extent -4.56,-3.6 3.6,3.6, body extent -3.55,-3.55 3.55,3.55, height 0.85
C0402 [mm]
  rrect35% 0.5x0.55 smd: 1(-0.5,0) 2(0.5,0)
  silkscreen extent -1,-0.5 1,0.5, body extent -0.53,-0.28 0.52,0.27, height 0.55
C0603 [mm]
  rrect35% 0.8x0.991 smd: 1(-0.85,0) 2(0.85,0)
  silkscreen extent -1.52,-0.75 1.52,0.75, body extent -0.88,-0.48 0.87,0.47, height 0.87
C0805 [mm] "Chip Capacitor, Body 2.0x1.3mm, IPC High Density"
  rect 1.1x1.4 smd: 1(-0.75,0) 2(0.75,0)
  body extent -1.1,-0.72 1.1,0.72, height 1.4
CAP_0402 [mm]
  rect 0.4x0.5 smd: 1(-0.5,0) 2(0.5,0)
  silkscreen extent 0,-0.2 0,0.2, body extent -0.5,-0.25 0.5,0.25, height 0.5
CAP_0603 [mm]
  rect 0.6x0.8 smd: 1(-0.7,0) 2(0.7,0)
  silkscreen extent 0,-0.4 0,0.4, body extent -0.75,-0.41 0.75,0.41, height 0.82
CAPC1005X04L [mm]
  rect 0.6x0.5 smd: 1(-0.5,0) 2(0.5,0)
  silkscreen extent -0.9,-0.35 0.9,0.35, body extent -0.51,-0.25 0.51,0.25, height 0.5
CAPC1608X06L [mm]
  rect 0.75x0.8 smd: 1(-0.675,0) 2(0.675,0)
  silkscreen extent -1.17,-0.5 1.17,0.5, body extent -0.8,-0.43 0.8,0.43, height 0.8
CAPC1608X08N_0603 [mm]
  rect 0.7x0.8 smd: 1(-0.7,0) 2(0.7,0)
  silkscreen extent 0,-0.38 0,0.38, body extent -0.87,-0.47 0.88,0.48, height 0.9
COAXIAL-SWF [mm]
  rect 0.5x0.58 smd: 1(0,1.16) 3(0,-1.16)
  rect 0.75x0.8 smd: 2(-1.025,-0.95) 2(-1.025,0.95) 2(1.025,-0.95) 2(1.025,0.95)
  Top Layer pour cut-out: 0.65,-0.55 -0.65,-0.55 -0.65,-1.35 0.65,-1.35
  Top Layer pour cut-out: -0.65,0.55 0.65,0.55 0.65,1.35 -0.65,1.35
  silkscreen extent -1.25,-1.25 1.25,1.25, body extent -1.26,-1.3 1.26,1.3, height 1.55
CONN_0524352271_j [mm]
  rect 0.8x0.3 smd mask+0.05: 1(3.1,-5.25) 2(3.1,-4.75) 3(3.1,-4.25) 4(3.1,-3.75) 5(3.1,-3.25) 6(3.1,-2.75) 7(3.1,-2.25) 8(3.1,-1.75) 9(3.1,-1.25) 10(3.1,-0.75) 11(3.1,-0.25) 12(3.1,0.25) 13(3.1,0.75) 14(3.1,1.25) 15(3.1,1.75) 16(3.1,2.25) 17(3.1,2.75) 18(3.1,3.25) 19(3.1,3.75) 20(3.1,4.25) 21(3.1,4.75) 22(3.1,5.25)
  rect 0.2x0.2 smd mask+0.05: 23(1.1,7.55) 24(1.1,-7.55)
  Top Layer region: 2.7,6.5 2.7,8.9 0.5,8.9 0.5,7.8 -0.35,7.8 -0.35,6.5
  Top Layer region: 2.7,-6.5 2.7,-8.9 0.5,-8.9 0.5,-7.8 -0.35,-7.8 -0.35,-6.5
  Top Layer pour cut-out: -0.55,6.3 -0.55,8 0.3,8 0.3,9.1 2.9,9.1 2.9,6.3 2.2,6.3 2.2,5.7 0.8,5.7 0.8,6.3
  Top Layer pour cut-out: -0.55,-6.3 -0.55,-8 0.3,-8 0.3,-9.1 2.9,-9.1 2.9,-6.3 2.2,-6.3 2.2,-5.7 0.8,-5.7 0.8,-6.3
  Top Layer keep-out region: 0.8,6.5 2.2,6.5 2.2,5.7 0.8,5.7
  Top Layer keep-out region: 0.8,-5.7 2.2,-5.7 2.2,-6.5 0.8,-6.5
  silkscreen extent -2.3,-8.5 4.1,8.5, body extent -2,-8.8 3.2,8.8, height 2.1
CUI_SJ2-25515B-SMT-TR [mm]
  rect 1.8x2.4 smd: 1(-3.4,4)
  rect 1.8x1.6 smd: 2(4.6,3.6) 3(4.6,-3.6)
  rect 1.8x1.8 smd: 4(0.6,-3.7) 5(-3.4,-3.7)
  rect 1.7x1.4 smd: 10(5.95,1)
  round 1.1 hole 1.1 unplated: ""(-2.2,0) ""(3.1,0)
  silkscreen extent -7.9,-3.4 5.1,4.65, body extent -7.99,-4.1 6.21,4.7, height 3.99
CUI_UJ2-MIBH-G-SMT-TR [mm]
  rect 0.4x1.35 smd: 1(-1.3,2.675) 2(-0.65,2.675) 3(0,2.675) 4(0.65,2.675) 5(1.3,2.675)
  rect 1.9x1.9 smd: S1(-3.95,0) S2(-1.2,0) S3(1.2,0) S4(3.95,0)
  round 0.55 hole 0.55 unplated: ""(-2,2.15) ""(2,2.15)
  silkscreen extent -4.05,-1.45 4.05,3.4, body extent -4.05,-2.76 4.05,2.88, height 2.75
DCK0005A_L [mm]
  rect 0.9x0.4 smd paste-0.025 mask+0.05: 1(-1.1,0.65) 2(-1.1,0) 3(-1.1,-0.65) 4(1.1,-0.65) 5(1.1,0.65)
  silkscreen extent -0.7,-1.2 0.7,1.2, body extent -1.05,-1 1.05,1, height 1
DPV8_1P7X0P4#1 [mm]
  rect 0.38x0.3 smd paste+0 mask+0.05: 1(-0.61,0.75) 2(-0.61,0.25) 3(-0.61,-0.25) 4(-0.61,-0.75) 5(0.61,-0.75) 6(0.61,-0.25) 7(0.61,0.25) 8(0.61,0.75)
  rect 0.4x0.4 smd far side paste-0.837 mask+0.05: 9(0,0)
  Top Layer region: -0.2,0.85 0.2,0.85 0.2,-0.85 -0.2,-0.85
  silkscreen extent -1.15,-1.2 0.8,1.2, body extent -0.8,-1.05 0.8,1.05, height 0.65
DPV8_1P7X0P4#2 [mm]
  rect 0.38x0.3 smd paste+0 mask+0.05: 1(-0.61,0.75) 2(-0.61,0.25) 3(-0.61,-0.25) 4(-0.61,-0.75) 5(0.61,-0.75) 6(0.61,-0.25) 7(0.61,0.25) 8(0.61,0.75)
  rect 0.4x0.4 smd paste-0.837 mask+0.05: 9(0,0)
  Top Layer region: -0.2,-0.85 0.2,-0.85 0.2,0.85 -0.2,0.85
  silkscreen extent -1.15,-1.2 0.8,1.2, body extent -0.8,-1.05 0.8,1.05, height 0.65
DQM8 [mm]
  rect 0.7x0.2 smd mask+0.05: 1(-0.45,0.6) 2(-0.45,0.2) 3(-0.45,-0.2) 4(-0.45,-0.6) 5(0.45,-0.6) 6(0.45,-0.2) 7(0.45,0.2) 8(0.45,0.6)
  body extent -0.6,-0.9 0.6,0.9, height 0.5
Fiducial [mm]
  round 1.5 smd paste+0 mask+0.75: ""(0,0)
  round 1.5 smd far side paste+0 mask+0.75: ""(0,0)
  Top Layer pour cut-out: 0,1.6 0.158,1.6 0.467,1.538 0.758,1.418 1.02,1.243 1.243,1.02 1.418,0.758 1.538,0.467 1.6,0.158 1.6,0 1.6,0 1.6,-0.158 1.538,-0.467 1.418,-0.758 1.243,-1.02 1.02,-1.243 0.758,-1.418 0.467,-1.539 0.158,-1.6 0,-1.6 -0.158,-1.6 -0.467,-1.538 -0.758,-1.418 -1.02,-1.243 -1.243,-1.02 -1.418,-0.758 -1.538,-0.467 -1.6,-0.158 -1.6,0 -1.6,0.158 -1.538,0.467 -1.418,0.758 -1.243,1.02 -1.02,1.243 -0.758,1.418 -0.467,1.538 -0.158,1.6 0,1.6
  Bottom Layer pour cut-out: 0,1.6 0.158,1.6 0.467,1.538 0.758,1.418 1.02,1.243 1.243,1.02 1.418,0.758 1.538,0.467 1.6,0.158 1.6,0 1.6,-0.158 1.538,-0.467 1.418,-0.758 1.243,-1.02 1.02,-1.243 0.758,-1.418 0.467,-1.539 0.158,-1.6 0,-1.6 -0.158,-1.6 -0.467,-1.538 -0.758,-1.418 -1.02,-1.243 -1.243,-1.02 -1.418,-0.758 -1.538,-0.467 -1.6,-0.158 -1.6,0 -1.6,0.158 -1.538,0.467 -1.418,0.758 -1.243,1.02 -1.02,1.243 -0.758,1.418 -0.467,1.538 -0.158,1.6 0,1.6
  body extent -1.49,-1.5 1.5,1.5
Flip-Chip4 [mm]
  round 0.2 smd mask+0: A1(-0.175,0.175) A2(0.175,0.175) B1(-0.175,-0.175) B2(0.175,-0.175)
  silkscreen extent -0.5,0.41 -0.41,0.5, body extent -0.32,-0.32 0.32,0.32, height 0.45
IND_LPD5030 [mm]
  rect 0.75x0.75 smd: 1(-2.125,1.125) 1(-1.125,2.125) 2(-2.125,-1.125) 2(-1.125,-2.125) 3(1.125,-2.125) 3(2.125,-1.125) 4(1.125,2.125) 4(2.125,1.125)
  Top Layer region: -1.75,0.75 -2.5,0.75 -2.5,1.7 -1.7,2.5 -0.75,2.5 -0.75,1.75 -1.151,1.75 -1.75,1.151
  Top Layer region: 0.75,1.75 0.75,2.5 1.7,2.5 2.5,1.7 2.5,0.75 1.75,0.75 1.75,1.151 1.151,1.75
  Top Layer region: 1.75,-0.75 2.5,-0.75 2.5,-1.7 1.7,-2.5 0.75,-2.5 0.75,-1.75 1.151,-1.75 1.75,-1.151
  Top Layer region: -0.75,-1.75 -0.75,-2.5 -1.7,-2.5 -2.5,-1.7 -2.5,-0.75 -1.75,-0.75 -1.75,-1.151 -1.151,-1.75
  silkscreen extent -2.8,-2.8 2.8,2.8, body extent -2.44,-2.44 2.44,2.44, height 2.98
INDC1005X04L [mm]
  rect 0.65x0.5 smd: 1(-0.475,0) 2(0.475,0)
  silkscreen extent -0.9,-0.35 0.9,0.35, body extent -0.5,-0.3 0.5,0.3, height 0.5
INDC1608X06L [mm]
  rect 0.75x0.8 smd: 1(-0.675,0) 2(0.675,0)
  silkscreen extent -1.17,-0.5 1.17,0.5, body extent -0.8,-0.48 0.8,0.48, height 0.8
JST_S3B-ZR-SM4A-TF [mm]
  rect 0.7x2.5 smd: 1(-1.5,1.8) 2(0,1.8) 3(1.5,1.8)
  rect 1.1x1.9 smd: S1(-3.45,-1.8) S2(3.45,-1.8)
  silkscreen extent -3.86,-3.75 3.82,3.91, body extent -3.79,-3.75 3.71,2.75, height 3.7
L0402 [mm]
  rrect35% 0.5x0.55 smd: 1(-0.5,0) 2(0.5,0)
  silkscreen extent -1,-0.51 1,0.5, body extent -0.53,-0.25 0.53,0.25, height 0.71
L0603 [mm]
  rrect35% 0.8x1 smd: 1(-0.85,0) 2(0.85,0)
  silkscreen extent -1.5,-0.75 1.5,0.75, body extent -0.8,-0.4 0.8,0.4, height 0.8
LED_0606_RGB_WURTH [mm] "Chip; Body 1.6 x 1.6 mm (LxW typ) WURTH"
  rect 0.8x0.5 smd: A(-0.8,0.45) BK(-0.8,-0.45) GK(0.8,-0.45) RK(0.8,0.45)
  body extent -0.8,-0.8 0.8,0.8, height 0.4
LOGO_ACME_CPU [mm]
Logo_ESD [mm]
  silkscreen extent -3.34,-2.24 3.61,3.67
MIC_IM69D130V01XTSA1 [mm]
  rect 0.75x0.45 smd paste-1: 1(0.85,1.5) 2(0.85,0.8) 3(-0.85,1.5) 4(-0.85,0.8)
  rect 0.1x0.1 smd paste-1 mask+0: 5(0,0.12)
  round 0.8 hole 0.8 unplated: ""(0,-0.68)
  Top Layer region: 248 vertices and 0 holes, not listed, extent -1.03,-1.71 1.03,0.35
  silkscreen extent -1.54,-2 2,2.04, body extent -1.5,-2 1.5,2, height 1.3
MOLEX_5034801000 [mm]
  rect 0.3x0.7 smd mask+0.05: 1(-2.25,1.5) 2(-1.75,1.5) 3(-1.25,1.5) 4(-0.75,1.5) 5(-0.25,1.5) 6(0.25,1.5) 7(0.75,1.5) 8(1.25,1.5) 9(1.75,1.5) 10(2.25,1.5)
  rect 0.3x1 smd mask+0.05: S1(-3.04,-1.15) S2(3.04,-1.15)
  silkscreen extent -3.35,-1.8 3.35,2.33, body extent -3.35,-1.8 3.35,1.8, height 1.85
"Net Tie 1x3mm" [mm]
  rect 1.5x1 smd paste-1 mask-1: 1(-0.75,0) 2(0.75,0)
  Top Layer region: -0.05,0.5 0.05,0.5 0.05,-0.5 -0.05,-0.5
"Net Tie 6x30mil"#1 [mil]
  rect 16x6 smd far side paste-5 mask-5: 1(-7,0) 2(7,0)
"Net Tie 6x30mil"#2 [mil]
  rect 16x6 smd paste-5 mask-5: 1(-7,0) 2(7,0)
QFN50P400X400X100_HS-25N [mm]
  oval 0.8x0.25 smd: 1(-1.925,1.25) 2(-1.925,0.75) 3(-1.925,0.25) 4(-1.925,-0.25) 5(-1.925,-0.75) 6(-1.925,-1.25) 13(1.925,-1.25) 14(1.925,-0.75) 15(1.925,-0.25) 16(1.925,0.25) 17(1.925,0.75) 18(1.925,1.25)
  oval 0.25x0.8 smd: 7(-1.25,-1.925) 8(-0.75,-1.925) 9(-0.25,-1.925) 10(0.25,-1.925) 11(0.75,-1.925) 12(1.25,-1.925) 19(1.25,1.925) 20(0.75,1.925) 21(0.25,1.925) 22(-0.25,1.925) 23(-0.75,1.925) 24(-1.25,1.925)
  rect 2.68x2.68 smd: 25(0,0)
  silkscreen extent -2.92,-2.15 2.15,2.15, body extent -2.05,-2.05 2.05,2.05, height 1
QFN-6L [mm]
  rect 0.6x0.25 smd: 1(-0.65,0.5) 2(-0.65,0) 3(-0.65,-0.5) 4(0.65,-0.5) 5(0.65,0) 6(0.65,0.5)
  silkscreen extent -1.38,-1.03 0.92,1.07, body extent -0.77,-0.87 0.77,0.87, height 0.55
QFN_BMP388_BOS [mm]
  rect 0.275x0.25 smd paste+0 mask+0.05: 1(-0.762,0.25) 2(-0.762,-0.25) 6(0.762,-0.25) 7(0.762,0.25)
  rect 0.25x0.275 smd paste+0 mask+0.05: 3(-0.5,-0.762) 4(0,-0.762) 5(0.5,-0.762) 8(0.5,0.762) 9(0,0.762) 10(-0.5,0.762)
  silkscreen extent -1.5,-1.1 1.1,1.1, body extent -1,-1 1,1, height 0.8
R0402 [mm]
  rrect35% 0.5x0.55 smd: 1(-0.5,0) 2(0.5,0)
  silkscreen extent -1,-0.51 1,0.5, body extent -0.53,-0.25 0.53,0.25, height 0.71
R0603 [mm]
  rrect35% 0.8x0.991 smd: 1(-0.85,0) 2(0.85,0)
  silkscreen extent -1.5,-0.75 1.5,0.75, body extent -0.8,-0.41 0.8,0.41, height 0.71
R_0402 [mm]
  rect 0.4x0.5 smd: 1(-0.5,0) 2(0.5,0)
  silkscreen extent 0,-0.2 0,0.2, body extent -0.5,-0.25 0.5,0.25, height 0.4
SIL0010D [mm]
  rrect20% 0.65x0.25 smd mask+0.05: 1(-0.625,1) 2(-0.625,0.5) 3(-0.625,0) 4(-0.625,-0.5) 5(-0.625,-1) 6(0.625,-1) 7(0.625,-0.5) 8(0.625,0) 9(0.625,0.5) 10(0.625,1)
  silkscreen extent -1.48,-1.48 1.05,1.53, body extent -1.05,-1.3 1.05,1.3, height 1.1
SOD-123 [mm]
  rect 0.9x0.95 smd: 1(-1.6,0) 2(1.6,0)
  silkscreen extent -1.87,0.7 -1.77,0.8, body extent -1.82,-0.77 1.83,0.78, height 1.15
SODFL375X95-2N [mm]
  rect 0.7x0.95 smd: 1(-1.75,0)
  rect 2x1.95 smd: 1(-0.432,0)
  rect 0.95x0.65 smd: 2(1.7,0)
  silkscreen extent -2,0.92 -1.81,1.12, body extent -1.87,-1.02 1.88,1.02, height 0.95
Solderbridge [mm]
  round 0.2 smd paste-10: 1(-0.312,0) 2(0.312,0)
  Top Layer region: 0.077,0.432 0.152,0.505 0.271,0.467 0.335,0.424 0.409,0.351 0.462,0.292 0.521,0.193 0.549,0.099 0.544,-0.122 0.518,-0.193 0.434,-0.33 0.351,-0.411 0.259,-0.469 0.157,-0.5 0.107,-0.483 0.077,-0.43
  Top Layer region: -0.077,-0.432 -0.152,-0.505 -0.271,-0.467 -0.335,-0.424 -0.409,-0.351 -0.462,-0.292 -0.521,-0.193 -0.549,-0.099 -0.544,0.122 -0.518,0.193 -0.434,0.33 -0.351,0.411 -0.259,0.469 -0.157,0.5 -0.107,0.483 -0.077,0.43
  Top Layer lines w0.152: -0.153,0.431 ccw(c-0.042,0) -0.473,-0.112 ccw(c-0.042,0) -0.153,-0.431 ; 0.153,0.431 cw(c0.042,0) 0.482,-0.068 cw(c0.042,0) 0.153,-0.431
Solderbridge_Shorted [mm]
  round 0.2 smd paste-10: 1(-0.338,0) 2(0.338,0)
  Top Layer region: -0.102,-0.432 -0.178,-0.505 -0.296,-0.467 -0.361,-0.424 -0.434,-0.351 -0.488,-0.292 -0.546,-0.193 -0.574,-0.099 -0.569,0.122 -0.544,0.193 -0.46,0.33 -0.376,0.411 -0.284,0.469 -0.183,0.5 -0.132,0.483 -0.102,0.43
  Top Layer region: 0.102,0.432 0.178,0.505 0.296,0.467 0.361,0.424 0.434,0.351 0.488,0.292 0.546,0.193 0.574,0.099 0.569,-0.122 0.544,-0.193 0.46,-0.33 0.376,-0.411 0.284,-0.469 0.183,-0.5 0.132,-0.483 0.102,-0.43
  Top Layer lines w0.152: -0.178,0.431 ccw(c-0.068,0) -0.178,-0.431 ; 0.178,0.431 cw(c0.068,0) 0.178,-0.431
  Top Layer lines w0.203: -0.338,0 0.338,0
SOT363_SOP65P210X265-6N [mm]
  rrect30% 0.66x0.3 smd mask+0.05: 1(-0.92,0.65) 2(-0.92,0) 3(-0.92,-0.65) 4(0.92,-0.65) 5(0.92,0) 6(0.92,0.65)
  silkscreen extent -1.1,-1.1 0.2,1.35, body extent -1.1,-1.1 1.1,1.1, height 1.1
SOT908-1 [mm]
  rect 0.8x0.25 smd mask+0.05: 1(-1.425,0.75) 2(-1.425,0.25) 3(-1.425,-0.25) 4(-1.425,-0.75) 5(1.425,-0.75) 6(1.425,-0.25) 7(1.425,0.25) 8(1.425,0.75)
  rect 1.65x2.1 smd mask+0.05: 9(0,0)
  silkscreen extent -2.1,-1.68 1.68,1.73, body extent -1.55,-1.55 1.55,1.55, height 1
SPKR_CMS-151135-078S [mm]
  rect 1x1 smd paste-1 mask+0: M(-5,-6.99) P(5,-6.99)
  Top Layer region: -3.9,-6.14 -3.9,-7.7 -5.9,-7.7 -5.9,-5.3 -4.74,-5.3
  Top Layer region: 5.9,-7.7 3.9,-7.7 3.9,-6.14 4.74,-5.3 5.9,-5.3
  Top Layer lines w0: -3.9,-7.7 -3.9,-6.14 -4.74,-5.3 -5.9,-5.3 -5.9,-7.7 -3.9,-7.7
  silkscreen extent -5.5,-7.5 5.5,7.5, body extent -5.5,-7.49 5.5,7.51, height 4.5
ST_QFN_1610 [mm]
  rect 0.55x0.8 smd: 1(-0.65,0) 2(0.65,0)
  silkscreen extent -0.95,0.75 -0.85,0.85, body extent -0.85,-0.55 0.85,0.55, height 0.6
TC2030-IDC-NL [mil]
  round 39 hole 39 unplated paste-20: 0(-100,0) 0(100,-40) 0(100,40)
  round 31 smd paste-16: 1(-50,-25) 2(-50,25) 3(0,-25) 4(0,25) 5(50,-25) 6(50,25)
  Top Layer pour cut-out: -50,25 50,25 50,-25 -50,-25
  Top Layer keep-out region: -44,-16 44,-16 44,16 -44,16
  silkscreen extent -79,-50 69,50
Testpoint [mm]
  round 1 smd paste-0.508 mask-0.025: 1(0,0)
  body extent -0.5,-0.5 0.5,0.5
U-DFN3810-9 [mm]
  rect 0.5x0.3 smd paste-0.025 mask+0.05: 1(-0.495,1.7) 2(-0.495,0.8) 3(-0.495,0) 4(-0.495,-0.8) 5(-0.495,-1.7) 6(0.495,-1.3) 7(0.495,-0.4) 8(0.495,0.4) 9(0.495,1.3)
  silkscreen extent -1.4,-2.06 0.58,2.06, body extent -0.5,-1.9 0.5,1.9, height 0.55
W-PDFN-8_8X6_P127 [mm]
  rect 1.35x0.8 smd mask+0.05: 1(-3.575,1.905) 2(-3.575,0.635) 3(-3.575,-0.635) 4(-3.575,-1.905) 5(3.575,-1.905) 6(3.575,-0.635) 7(3.575,0.635) 8(3.575,1.905)
  rect 4x5 smd mask+0.05: 9(0,0)
  silkscreen extent -4.1,-3.1 4.1,3.1, body extent -4,-3 4,3.01, height 0.8
XDCR_BMI270 [mm]
  rect 0.475x0.25 smd: 1(-1.162,0.75) 2(-1.162,0.25) 3(-1.162,-0.25) 4(-1.162,-0.75) 8(1.162,-0.75) 9(1.162,-0.25) 10(1.162,0.25) 11(1.162,0.75)
  rect 0.25x0.475 smd: 5(-0.5,-0.913) 6(0,-0.913) 7(0.5,-0.913) 12(0.5,0.913) 13(0,0.913) 14(-0.5,0.913)
  silkscreen extent -2.07,-1.25 1.5,1.25, body extent -1.5,-1.25 1.5,1.25, height 0.86
XDCR_MAX30101EFD+ [mm]
  rect 0.75x0.35 smd: 1(-1.2,2.4) 2(-1.2,1.6) 3(-1.2,0.8) 4(-1.2,0) 5(-1.2,-0.8) 6(-1.2,-1.6) 7(-1.2,-2.4) 8(1.2,-2.4) 9(1.2,-1.6) 10(1.2,-0.8) 11(1.2,0) 12(1.2,0.8) 13(1.2,1.6) 14(1.2,2.4)
  silkscreen extent -2.25,-2.85 0.51,2.85, body extent -1.57,-2.79 1.58,2.79, height 1.65
XTAL_3215 [mm]
  rect 1x1.8 smd: 1(-1.25,0) 2(1.25,0)
  silkscreen extent -0.6,-0.75 0.6,0.75, body extent -1.6,-0.75 1.6,0.75, height 0.81
YFP0020 [mm]
  round 0.25 smd mask+0: A1(-0.6,0.8) A2(-0.2,0.8) A3(0.2,0.8) A4(0.6,0.8) B1(-0.6,0.4) B2(-0.2,0.4) B3(0.2,0.4) B4(0.6,0.4) C1(-0.6,0) C2(-0.2,0) C3(0.2,0) C4(0.6,0) D1(-0.6,-0.4) D2(-0.2,-0.4) D3(0.2,-0.4) D4(0.6,-0.4) E1(-0.6,-0.8) E2(-0.2,-0.8) E3(0.2,-0.8) E4(0.6,-0.8)
  silkscreen extent -1.52,-1.24 1.04,1.24, body extent -0.78,-0.98 0.78,0.98, height 0.5
YZV4_TEX [mm]
  round 0.305 smd paste+0 mask+0: A1(-0.25,0.25) A2(0.25,0.25) B1(-0.25,-0.25) B2(0.25,-0.25)
  body extent -0.47,-0.47 0.47,0.47, height 0.49

## Part data
C1 C2 C7 C13 C15 C22 C27 C39 C46 C47 C73 C74: "0.1µF ±10% 50V Ceramic Capacitor X7R 0402 (1005 Metric)", Capacitance=100nF, Case Code (Imperial)=0402, Case Code (Metric)=1005, Dielectric=X7R, Manufacturer=TDK, Manufacturer Part Number=CGA2B3X7R1H104K050BB, Max Operating Temperature=125°C, Min Operating Temperature=-55°C, Package Quantity=1, Ratings=AEC-Q200, Supplier Part Number 1=445-6899-1-ND, Tolerance=10%, Voltage=50V, Case/Package=0402, ComponentLink1Description=http://product.tdk.com/capacitor/mlcc/en/documents/mlccspec_automotive_general_midvoltage_en.pdf?src-supplier=Future+Electronics, ComponentLink1URL=http://product.tdk.com/capacitor/mlcc/en/documents/mlccspec_automotive_general_midvoltage_en.pdf?src-supplier=Future+Electronics, ComponentLink2Description=http://www.farnell.com/datasheets/1807242.pdf?src-supplier=Element14, ComponentLink2URL=http://www.farnell.com/datasheets/1807242.pdf?src-supplier=Element14, ComponentLink3Description=http://www.mouser.com/ds/2/400/lcc_automotive_general_en-843974.pdf?src-supplier=Mouser, ComponentLink3URL=http://www.mouser.com/ds/2/400/lcc_automotive_general_en-843974.pdf?src-supplier=Mouser, ComponentLink4Description=http://www.farnell.com/datasheets/1936565.pdf?src-supplier=Element14, ComponentLink4URL=http://www.farnell.com/datasheets/1936565.pdf?src-supplier=Element14, ComponentLink5Description=http://www.farnell.com/datasheets/1735392.pdf?src-supplier=Element14, ComponentLink5URL=http://www.farnell.com/datasheets/1735392.pdf?src-supplier=Element14, Composition=Ceramic, Depth=0.5mm, Height=0.5mm, Lead Free="Lead Free", Length=1mm, Mount="Surface Mount", Packaging="Tape and Reel", Pricing 1="1=0.17, 10=0.118, 50=0.0668, 100=0.0553, 500=0.0388, 1000=0.0321, 2500=0.0299, 5000=0.0273 (USD)", REACH SVHC="No SVHC", Stock 1=2925303, Supplier 1=Digi-Key, Termination=SMD/SMT, Thickness=0.022inch, Voltage Rating=50V, Voltage Rating (DC)=50V, Weight=2.3E-05oz, Width=0.02inch
C3 C6: "Cap Cer 10nF 25V X7R 10% 0402", Capacitance=10nF, Case Code (Imperial)=0402, Case Code (Metric)=1005, Dielectric=X7R, Insulation Resistance=100GR, Manufacturer="Kyocera AVX", Manufacturer Part Number=04023C103KAT2A, Max Operating Temperature=125°C, Min Operating Temperature=-55°C, Package Quantity=1, Supplier Part Number 1=478-1113-1-ND, Tolerance=10%, Voltage=25V, Case/Package=0402, ComponentLink1Description=http://www.farnell.com/datasheets/2237835.pdf?src-supplier=Element14, ComponentLink1URL=http://www.farnell.com/datasheets/2237835.pdf?src-supplier=Element14, ComponentLink2Description=http://catalogs.avx.com/SurfaceMount.pdf?src-supplier=Digi-Key, ComponentLink2URL=http://catalogs.avx.com/SurfaceMount.pdf?src-supplier=Digi-Key, ComponentLink3Description=http://www.alliedelec.com/m/d/a24bb5190bea413b2ff164816f55e87c.pdf?src-supplier=Allied+Electronics, ComponentLink3URL=http://www.alliedelec.com/m/d/a24bb5190bea413b2ff164816f55e87c.pdf?src-supplier=Allied+Electronics, ComponentLink4Description=http://uk.rs-online.com/webdocs/13ec/0900766b813ece35.pdf?src-supplier=RSComponents, ComponentLink4URL=http://uk.rs-online.com/webdocs/13ec/0900766b813ece35.pdf?src-supplier=RSComponents, Depth=0.5mm, Dissipation Factor=12.5%, Height=0.56mm, Lead Free="Lead Free", Length=1mm, Mount="Surface Mount,PCB", Packaging="Tape and Reel", Pricing 1="1=0.1, 10=0.034, 50=0.0182, 100=0.0149, 500=0.0107, 1000=0.0084, 2500=0.0076, 5000=0.007 (USD)", Radiation Hardening=No, REACH SVHC="No SVHC", Stock 1=1015537, Supplier 1=Digi-Key, Termination=SMD/SMT, Thickness=0.022inch, Voltage Rating=25V, Voltage Rating (DC)=25V, Width=0.02inch
C4: "10pF ±10% 50V Ceramic Capacitor C0G, NP0 0402 (1005 Metric)", Capacitance=10pF, Case Code (Imperial)=0402, Case Code (Metric)=1005, Dielectric=C0G, Dielectric Material=Ceramic, Manufacturer=KEMET, Manufacturer Part Number=C0402C100K5GACTU, Max Operating Temperature=125°C, Min Operating Temperature=-55°C, Package Quantity=10000, Supplier Part Number 1=399-7747-1-ND, Tolerance=10%, Voltage Rating=50V, Case/Package=0402, ComponentLink1Description=http://www.mouser.com/ds/2/212/KEM_C1003_C0G_SMD-1101588.pdf?src-supplier=Mouser, ComponentLink1URL=http://www.mouser.com/ds/2/212/KEM_C1003_C0G_SMD-1101588.pdf?src-supplier=Mouser, Depth=0.5mm, Dissipation Factor=0.1%, Height=0.5mm, Lead Free="Lead Free", Lead Pitch=0.3mm, Length=1mm, Mount="Surface Mount", Packaging="Tape and Reel", Pricing 1="1=0.1, 10=0.021, 50=0.0116, 100=0.0095, 500=0.0068, 1000=0.0053, 2500=0.0048, 5000=0.0045 (USD)", Radiation Hardening=No, REACH SVHC="No SVHC", Stock 1=57093, Supplier 1=Digi-Key, Termination=SMD/SMT, Thickness=0.022inch, Voltage Rating (DC)=50V, Width=0.02inch
C5: "100pF ±5% 50V Ceramic Capacitor C0G, NP0 0402 (1005 Metric)", Capacitance=100pF, Case Code (Imperial)=0402, Case Code (Metric)=1005, Dielectric=C0G, Dielectric Material=Ceramic, Insulation Resistance=100GR, Manufacturer=Yageo, Manufacturer Part Number=CC0402JRNPO9BN101, Max Operating Temperature=125°C, Min Operating Temperature=-55°C, Package Quantity=1, Supplier Part Number 1=311-1024-1-ND, Temperature Coefficient=30ppm/°C, Tolerance=5%, Voltage=50V, Case/Package=0402, ComponentLink1Description=http://www.farnell.com/datasheets/2213336.pdf?src-supplier=Newark, ComponentLink1URL=http://www.farnell.com/datasheets/2213336.pdf?src-supplier=Newark, ComponentLink2Description=http://www.yageo.com/documents/recent/UPY-GP_NP0_16V-to-50V_16.pdf?src-supplier=Digi-Key, ComponentLink2URL=http://www.yageo.com/documents/recent/UPY-GP_NP0_16V-to-50V_16.pdf?src-supplier=Digi-Key, ComponentLink3Description=http://documents.rs-components.com/techlib://itc_doclist_GB.htm?stockno=6698684&src-supplier=RSComponents, ComponentLink3URL=http://documents.rs-components.com/techlib://itc_doclist_GB.htm?stockno=6698684&src-supplier=RSComponents, ComponentLink4Description=http://www.yageo.com/documents/recent/UPY-GP_NP0_16V-to-50V_8.pdf?src-supplier=Avnet+Europe, ComponentLink4URL=http://www.yageo.com/documents/recent/UPY-GP_NP0_16V-to-50V_8.pdf?src-supplier=Avnet+Europe, ComponentLink5Description=http://www.farnell.com/datasheets/1443161.pdf?src-supplier=Element14, ComponentLink5URL=http://www.farnell.com/datasheets/1443161.pdf?src-supplier=Element14, ComponentLink6Description=http://www.farnell.com/datasheets/2213336.pdf?src-supplier=Element14, ComponentLink6URL=http://www.farnell.com/datasheets/2213336.pdf?src-supplier=Element14, Composition=Ceramic, Depth=0.5mm, Height=0.5mm, Lead Free="Lead Free", Length=1mm, Mount="Surface Mount", Number of Pins=2, Packaging="Tape and Reel", Pricing 1="1=0.1, 10=0.02, 100=0.0089, 500=0.0064, 1000=0.005, 2500=0.0046, 5000=0.0042 (USD)", Radiation Hardening=No, REACH SVHC="No SVHC", Stock 1=4235236, Supplier 1=Digi-Key, Termination=SMD/SMT, Thickness=0.022inch, Voltage Rating=50V, Voltage Rating (DC)=50V, Width=0.5mm